# Altium PCB BLE-T1.PcbDoc (part 2 of 2)
Units mm, origin at the board's own origin, x right, y up, seen from the top; angles counter-clockwise.
Board outline 285.25 x 94.86 mm, 2 copper layers (Component Side, Bottom Layer), stack 1.571 mm thick; 182 components, 142 nets, 832 pads, 32 vias.
Unrouted connection lines stored in the file: 3.
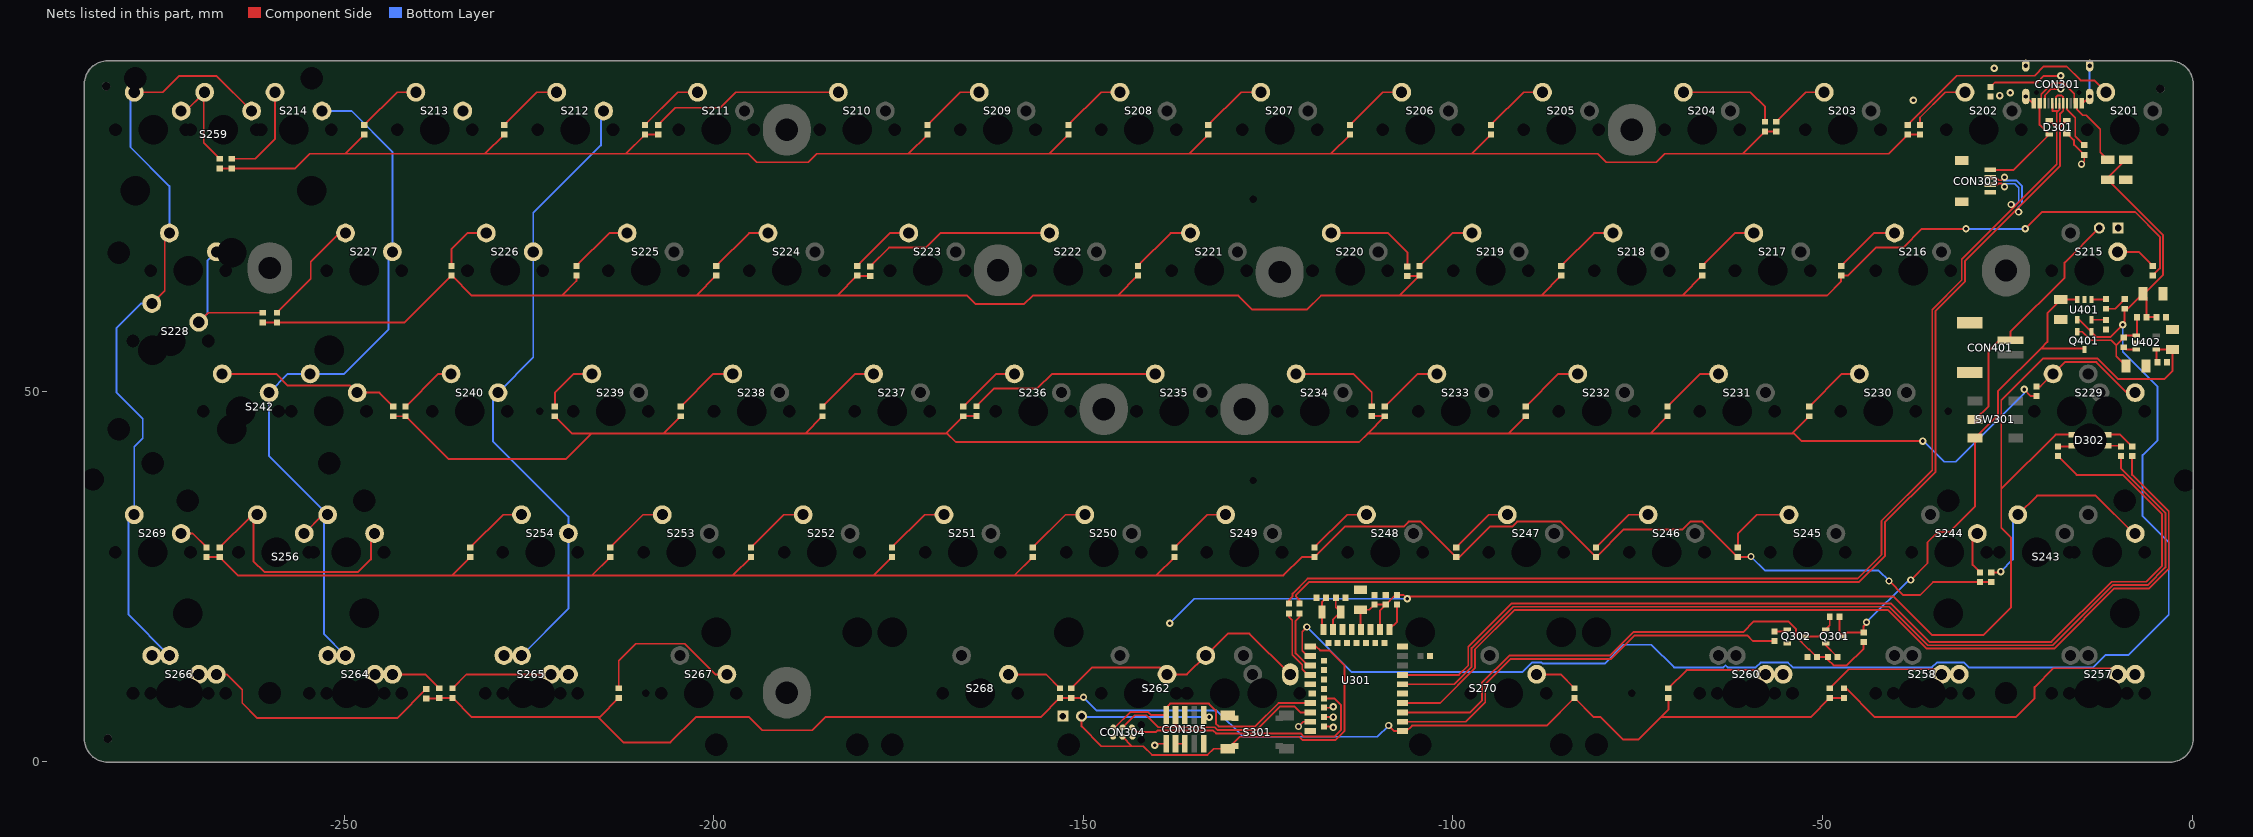
[diagram p2: the nets of this part, all layers, seen from the top]

## Via types
v1: diameter 1, hole 0.5, Component Side to Bottom Layer, tented both sides, 32 vias

## Nets (pads, with @x,y where several pads share a name; then routed paths per layer and width w, separated by ;. In a path a pad name is that pad's centre, name@x,y a point inside that pad or via, vN(x,y) a via of type N, cw(c..) or ccw(c..) an arc to the next point about the centre after c; other vN are vias at no path point) (continued)
col12: S212.2 S226.2 S240.2 S254.2 S265.2 | length 86.7
  Bottom Layer w0.254: S265.2@-226.002,14.295 -219.652,20.645 S254.2@-219.652,30.805 -219.652,33.089 -229.87,43.307 -229.87,49.163 S240.2@-229.177,49.855 -224.415,54.618 S226.2@-224.415,68.905 -224.415,74.162 -215.265,83.312 -215.265,87.58 S212.2@-214.89,87.955
col13: S213.2
col14: S214.2 S227.2 S242.2 S256.2 S264.2 | length 100.4
  Component Side w0.254: S256.2@-255.397,30.805 -252.857,33.345 S256.2@-252.222,33.345 S256.2@-252.222,33.528
  Bottom Layer w0.254: S214.2@-252.99,87.955 -248.991,87.955 -243.465,82.429 S227.2@-243.465,68.905 -243.967,68.403 -243.967,58.42 -249.992,52.395 S242.2@-254.584,52.395 -257.6,52.395 S242.2@-260.14,49.855 -260.14,41.263 S256.2@-252.222,33.345 -252.73,32.837 -252.73,17.216 S264.2@-249.809,14.295
col15: S228.2 S259.2 S266.2 S269.2 | length 106.8
  Component Side w0.254: S259.2@-278.384,90.495 -274.503,90.495 -272.288,92.71 -267.264,92.71 S259.2@-262.509,87.955 ; S228.2@-276.009,61.92 -274.266,63.663 -274.266,70.807 S228.2@-273.627,71.445
  Bottom Layer w0.254: S259.2@-279.146,89.739 S259.2@-278.39,90.495 ; S259.2@-278.384,90.495 -278.892,89.987 -278.892,83.058 -273.627,77.793 S228.2@-273.627,71.445 ; S228.2@-276.009,61.92 -277.424,61.92 -280.797,58.547 -280.797,49.911 -277.241,46.355 -277.241,43.688 -278.384,42.545 -278.384,41.021 -278.39,41.015 S269.2@-278.39,33.345 -279.146,32.589 -279.146,19.814 S266.2@-273.627,14.295
D_N: CON301.A7 CON301.B7 CON303.2 D301.2 R303.2 | length 167.6
  Component Side w0.254: R303.2@-120.777,21.309 -120.777,21.836 -121.247,22.306 -121.247,22.479 -119.491,24.235 -45.096,24.235 -41.58,27.751 -41.58,32.323 -34.722,39.181 -34.722,60.909 -30.727,64.904 -30.727,67.686 -17.869,80.545 -17.869,85.767 ; CON303.2@-27.305,78.978 -26.552,78.978 -26.162,78.588 -25.806,78.588 v1(-25.4,78.994) ; CON301.A7@-18.427,89.154 -18.427,89.86 -18.235,90.052 -17.665,90.052 -17.473,89.86 -17.473,89 CON301.B7@-17.45,89 -17.45,88.016 -17.869,87.597 -17.869,85.767 ; D301.2@-16.571,86.675 D301.2@-16.961,86.675 -17.869,85.767
  Bottom Layer w0.254: v1@-25.527,78.562 -23.814,78.562 -23.009,77.758 -23.009,75.474 -23.495,74.988 v1(-23.495,74.295)
D_P: CON301.A6 CON301.B6 CON303.3 D301.3 R304.2 | length 165.2
  Component Side w0.254: R304.2@-122.174,21.309 -122.174,21.836 -121.704,22.306 -121.704,22.668 -119.68,24.692 -45.285,24.692 -42.037,27.94 -42.037,32.512 -35.179,39.37 -35.179,61.099 -31.184,65.093 -31.184,67.876 -18.326,80.734 -18.326,85.64 ; CON303.3@-27.305,77.978 -26.403,77.978 -26.251,78.13 -25.806,78.13 v1(-25.4,77.724) ; D301.3@-19.361,86.675 -18.326,85.64 ; CON301.B6@-18.95,89 -18.927,88.977 -18.927,87.948 -18.165,87.948 ; CON301.A6@-17.95,89 -17.95,88.163 -18.165,87.948 ; -18.326,85.64 -18.326,87.786 -18.165,87.948
  Bottom Layer w0.254: v1@-25.527,78.105 -24.003,78.105 -23.466,77.568 -23.466,75.663 -23.818,75.311 v1(-24.511,75.311)
D_PRE_N: R303.1 U301.29 | length 8.3
  Component Side w0.254: R303.1@-120.777,20.009 -120.777,19.482 -121.285,18.974 -121.285,14.59 -119.649,12.954 U301.29@-119.307,12.954
D_PRE_P: R304.1 U301.31 | length 9.7
  Component Side w0.254: R304.1@-122.174,20.009 -122.174,19.482 -121.742,19.05 -121.742,14.4 -120.384,13.042 -120.384,12.419 -119.649,11.684 U301.31@-119.307,11.684
GND: C301.1 C302.1 C303.1 C304.1 C305.1 C306.1 C307.1 C402.1 C403.1 C404.1 C405.1 C406.1 CON301.A1B12 CON301.B1A12 CON301.S1 CON302.1 CON303.4 CON303.5 CON304.5 CON305.3 CON305.5 CON305.9 CON401.3 CON402.1 D301.1 Q302.2 R301.2 R302.2 R307.1 R402.2 R405.2 S301.1 U301.5 U301.21 U301.24 U401.2 U402.2 | length 13.7
  Component Side w0.254: CON305.3@-137.541,2.368 CON305.5@-136.271,2.368 ; CON301.S1@-22.52,89.915 -21.605,89 CON301.B1A12@-21.45,89 ; D301.1@-16.961,84.975 -16.002,84.016 -16.002,83.327 -15.905,83.327 R302.2@-14.605,82.027 -14.605,81.153 v1(-14.986,80.772) ; CON301.A1B12@-14.95,89 -14.795,89 CON301.S1@-13.88,89.915
  Bottom Layer w0.254: CON301.S1@-13.88,89.915 CON301.S1@-13.88,94.095
  other v1: -37.719,89.408 -26.035,90.043 -24.638,90.424 -26.797,93.726
LED1: R312.1 U301.4 | length 134.2
  Component Side w0.254: U301.4@-106.807,7.874 -101.727,7.874 -97.028,12.573 -97.028,15.113 -91.694,20.447 -41.148,20.447 -35.941,15.24 -18.669,15.24 -10.541,23.368 -5.842,23.368 -3.175,26.035 -3.175,33.782 -8.128,38.735 R312.1@-8.128,41.26
LED2: R310.2 U301.7 | length 139
  Component Side w0.254: U301.7@-106.807,11.684 -99.201,11.684 -97.936,12.949 -97.936,15.489 -92.07,21.355 -40.772,21.355 -35.565,16.148 -19.045,16.148 -10.917,24.276 -6.218,24.276 -4.083,26.411 -4.083,33.406 -9.412,38.735 -15.636,38.735 R310.2@-18.161,41.26
LED3: R311.2 U301.6 | length 133.1
  Component Side w0.254: U301.6@-106.807,10.414 -99.829,10.414 -97.482,12.761 -97.482,15.301 -91.882,20.901 -40.96,20.901 -35.753,15.694 -18.857,15.694 -10.729,23.822 -6.03,23.822 -3.629,26.223 -3.629,33.594 -9.652,39.617 R311.2@-9.652,41.26
NetC305_2: C305.2 U301.13 X301.2 | length 5
  Component Side w0.254: U301.13@-116.205,17.876 U301.13@-116.237,17.844 -116.237,19.161 X301.2@-115.205,20.193 -115.854,20.842 C305.2@-115.854,22.098
NetC306_2: C306.2 U301.11 X301.1 | length 4.6
  Component Side w0.254: U301.11@-117.507,17.844 -117.713,18.05 X301.1@-117.713,20.193 -117.713,21.576 C306.2@-117.191,22.098
NetC402_2: C402.2 D402.2 Q401.2 R404.1 U402.1 | length 15.1
  Component Side w0.254: Q401.2@-15.555,58.096 -14.892,58.096 -13.746,56.95 -10.961,56.95 -10.287,56.276 ; C402.2@-8.97,53.467 -10.287,54.784 -10.287,56.276 ; D402.2@-7.493,60.071 -7.493,57.697 U402.1@-7.598,57.592 -8.971,57.592 R404.1@-9.271,57.292 -10.287,56.276
NetCON301_A5: CON301.A5 R302.1 | length 6.6
  Component Side w0.254: CON301.A5@-16.95,89 -16.95,88.163 -15.836,87.049 -15.836,84.558 R302.1@-14.605,83.327
NetCON301_B5: CON301.B5 R301.1 | length 15.5
  Component Side w0.254: R301.1@-27.305,91.201 -26.697,91.809 -20.96,91.809 -20.059,92.71 v1(-17.78,92.71) ; CON301.B5@-19.95,89 -19.927,89.023 -19.927,90.052 -19.047,90.932 v1(-17.78,90.932)
  Bottom Layer w0.254: v1(-17.78,90.932) v1(-17.78,92.71)
NetCON401_1: CON401.1 CON402.2 SW301.2 | length 33.7
  Component Side w0.254: SW301.2@-29.376,46.228 -27.559,48.045 -27.559,55.499 -26.099,56.959 CON401.1@-24.599,56.959 -24.599,58.078 -17.272,65.405 -17.272,67.437 CON402.2@-12.573,72.136
NetD201_1: D201.1 S201.1 | length 31.5
  Component Side w0.254: D201.1@-38.481,86.065 -31.829,92.717 -21.336,92.717 -20.062,93.991 -17.012,93.991 -15.113,92.092 -13.287,92.092 S201.1@-11.69,90.495
NetD202_1: D202.1 S202.1 | length 8.5
  Component Side w0.254: D202.1@-36.83,86.065 -36.83,87.074 -33.409,90.495 S202.1@-30.74,90.495
NetD203_1: D203.1 S203.1 | length 8.1
  Component Side w0.254: D203.1@-56.261,86.502 -52.268,90.495 S203.1@-49.79,90.495
NetD204_1: D204.1 S204.1 | length 13.9
  Component Side w0.254: S204.1@-68.84,90.495 -59.761,90.495 -57.785,88.519 D204.1@-57.785,86.502
NetD205_1: D205.1 S205.1 | length 8.8
  Component Side w0.254: D205.1@-94.869,86.065 -90.439,90.495 S205.1@-87.89,90.495
NetD206_1: D206.1 S206.1 | length 8.8
  Component Side w0.254: D206.1@-113.919,86.065 -109.489,90.495 S206.1@-106.94,90.495
NetD207_1: D207.1 S207.1 | length 8.9
  Component Side w0.254: D207.1@-133.096,86.065 -128.666,90.495 S207.1@-125.99,90.495
NetD208_1: D208.1 S208.1 | length 8.8
  Component Side w0.254: D208.1@-152.019,86.065 -147.589,90.495 S208.1@-145.04,90.495
NetD209_1: D209.1 S209.1 | length 8.8
  Component Side w0.254: D209.1@-171.069,86.065 -166.639,90.495 S209.1@-164.09,90.495
NetD210_1: D210.1 S210.1 | length 26.2
  Component Side w0.254: D210.1@-207.518,86.065 -205.191,88.392 -199.136,88.392 -197.033,90.495 S210.1@-183.14,90.495
NetD211_1: D211.1 S211.1 | length 8.9
  Component Side w0.254: D211.1@-209.296,86.065 -204.866,90.495 S211.1@-202.19,90.495
NetD212_1: D212.1 S212.1 | length 8.9
  Component Side w0.254: D212.1@-228.346,86.065 -223.916,90.495 S212.1@-221.24,90.495
NetD213_1: D213.1 S213.1 | length 8.8
  Component Side w0.254: D213.1@-247.269,86.065 -242.839,90.495 S213.1@-240.29,90.495
NetD214_1: D214.1 S214.1 | length 13.3
  Component Side w0.254: D214.1@-265.176,81.493 -262.042,81.493 -259.34,84.195 S214.1@-259.34,90.495
NetD215_1: D215.1 S215.1 | length 5.6
  Component Side w0.254: S215.1@-10.102,68.905 -7.224,68.905 D215.1@-5.334,67.015
NetD216_1: D216.1 S216.1 | length 9.1
  Component Side w0.254: D216.1@-47.498,67.015 -43.068,71.445 S216.1@-40.265,71.445
NetD217_1: D217.1 S217.1 | length 8.8
  Component Side w0.254: D217.1@-66.294,67.015 -61.864,71.445 S217.1@-59.315,71.445
NetD218_1: D218.1 S218.1 | length 8.8
  Component Side w0.254: D218.1@-85.344,67.015 -80.914,71.445 S218.1@-78.365,71.445
NetD219_1: D219.1 S219.1 | length 8.9
  Component Side w0.254: D219.1@-104.521,67.015 -100.091,71.445 S219.1@-97.415,71.445
NetD220_1: D220.1 S220.1 | length 14
  Component Side w0.254: S220.1@-116.967,70.943 S220.1@-116.465,71.445 -108.783,71.445 -106.172,68.834 D220.1@-106.172,66.944
NetD221_1: D221.1 S221.1 | length 8.9
  Component Side w0.254: D221.1@-142.621,67.015 -138.191,71.445 S221.1@-135.515,71.445
NetD222_1: D222.1 S222.1 | length 26.1
  Component Side w0.254: D222.1@-178.816,66.944 -176.291,69.469 -171.323,69.469 -169.347,71.445 S222.1@-154.565,71.445
NetD223_1: D223.1 S223.1 | length 8.8
  Component Side w0.254: D223.1@-180.594,67.015 -176.164,71.445 S223.1@-173.615,71.445
NetD224_1: D224.1 S224.1 | length 8.8
  Component Side w0.254: D224.1@-199.644,67.015 -195.214,71.445 S224.1@-192.665,71.445
NetD225_1: D225.1 S225.1 | length 8.7
  Component Side w0.254: D225.1@-218.567,67.015 -214.137,71.445 S225.1@-211.715,71.445
NetD226_1: D226.1 S226.1 | length 7.9
  Component Side w0.254: D226.1@-235.458,67.015 -235.458,69.301 -233.314,71.445 S226.1@-230.765,71.445
NetD227_1: D227.1 S227.1 | length 15.1
  Component Side w0.254: D227.1@-259.08,60.665 -254.508,65.237 -254.508,67.564 -250.627,71.445 S227.1@-249.815,71.445
NetD228_1: D228.1 S228.1 | length 19.7
  Component Side w0.254: S228.1@-269.659,59.38 -268.374,60.665 D228.1@-260.985,60.665
  Bottom Layer w0.254: S228.1@-269.659,59.38 -268.478,60.561 -268.478,67.705 S228.1@-267.277,68.905
NetD229_1: D229.1 S229.1 | length 16.4
  Component Side w0.254: D229.1@-21.082,50.688 -20.541,50.688 S229.1@-18.834,52.395 -17.237,53.992 -12.978,53.992 -8.841,49.855 S229.1@-7.721,49.855
NetD230_1: D230.1 S230.1 | length 8.6
  Component Side w0.254: D230.1@-51.816,47.965 -47.386,52.395 S230.1@-45.027,52.395
NetD231_1: D231.1 S231.1 | length 8.8
  Component Side w0.254: D231.1@-70.993,47.965 -66.563,52.395 S231.1@-64.077,52.395
NetD232_1: D232.1 S232.1 | length 8.9
  Component Side w0.254: D232.1@-90.17,47.965 -85.74,52.395 S232.1@-83.127,52.395
NetD233_1: D233.1 S233.1 | length 8.9
  Component Side w0.254: D233.1@-109.22,47.965 -104.79,52.395 S233.1@-102.177,52.395
NetD234_1: D234.1 S234.1 | length 13.9
  Component Side w0.254: S234.1@-121.227,52.395 -113.482,52.395 -110.998,49.911 D234.1@-110.998,48.021
  Bottom Layer w0.254: S234.1@-121.793,51.83 S234.1@-121.227,52.395
NetD235_1: D235.1 S235.1 | length 26
  Component Side w0.254: D235.1@-164.465,48.021 -162.067,50.419 -156.21,50.419 -154.234,52.395 S235.1@-140.277,52.395
NetD236_1: D236.1 S236.1 | length 8.8
  Component Side w0.254: D236.1@-166.243,47.965 -161.813,52.395 S236.1@-159.327,52.395
NetD237_1: D237.1 S237.1 | length 8.8
  Component Side w0.254: D237.1@-185.293,47.965 -180.863,52.395 S237.1@-178.377,52.395
NetD238_1: D238.1 S238.1 | length 8.9
  Component Side w0.254: D238.1@-204.47,47.965 -200.04,52.395 S238.1@-197.427,52.395
NetD239_1: D239.1 S239.1 | length 8
  Component Side w0.254: D239.1@-221.488,47.965 -221.488,49.87 -218.963,52.395 S239.1@-216.477,52.395
NetD240_1: D240.1 S240.1 | length 8
  Component Side w0.254: D240.1@-241.681,47.965 -237.251,52.395 S240.1@-235.527,52.395
NetD242_1: D242.1 S242.1 | length 25
  Component Side w0.254: S242.1@-266.49,52.395 -259.207,52.395 -257.61,50.798 -249.177,50.798 S242.1@-248.234,49.855 -245.222,49.855 D242.1@-243.332,47.965
NetD243_1: D243.1 S243.1 | length 29
  Component Side w0.254: D243.1@-27.178,25.542 -26.02,25.542 v1(-25.908,25.654) ; S243.1@-23.596,33.345 -21,35.941 -13.081,35.941 -7.945,30.805 S243.1@-7.721,30.805
  Bottom Layer w0.254: v1(-25.908,25.654) -24.257,27.305 -24.257,32.684 S243.1@-23.596,33.345
NetD244_1: D244.1 S244.1 | length 5.9
  Component Side w0.254: S244.1@-29.083,30.805 -29.718,30.17 -29.718,26.558 D244.1@-28.702,25.542
NetD245_1: D245.1 S245.1 | length 9.8
  Component Side w0.254: D245.1@-61.468,28.915 -61.468,30.765 -58.888,33.345 S245.1@-54.552,33.345
NetD246_1: D246.1 S246.1 | length 9.9
  Component Side w0.254: D246.1@-80.645,28.915 -76.215,33.345 S246.1@-73.602,33.345 S246.1@-74.295,32.652
NetD247_1: D247.1 S247.1 | length 8.8
  Component Side w0.254: D247.1@-99.568,28.915 -95.138,33.345 S247.1@-92.652,33.345
NetD248_1: D248.1 S248.1 | length 8.9
  Component Side w0.254: D248.1@-118.745,28.915 -114.315,33.345 S248.1@-111.702,33.345
NetD249_1: D249.1 S249.1 | length 8.8
  Component Side w0.254: D249.1@-137.668,28.915 -133.238,33.345 S249.1@-130.752,33.345
NetD250_1: D250.1 S250.1 | length 8.9
  Component Side w0.254: D250.1@-156.845,28.915 -152.415,33.345 S250.1@-149.802,33.345
NetD251_1: D251.1 S251.1 | length 8.9
  Component Side w0.254: D251.1@-175.895,28.915 -171.465,33.345 S251.1@-168.852,33.345
NetD252_1: D252.1 S252.1 | length 8.9
  Component Side w0.254: D252.1@-194.945,28.915 -190.515,33.345 S252.1@-187.902,33.345
NetD253_1: D253.1 S253.1 | length 8.9
  Component Side w0.254: D253.1@-213.995,28.915 -209.565,33.345 S253.1@-206.952,33.345
NetD254_1: D254.1 S254.1 | length 8.8
  Component Side w0.254: D254.1@-232.918,28.915 -228.488,33.345 S254.1@-226.002,33.345
NetD256_1: D256.1 S256.1 | length 34.1
  Component Side w0.254: D256.1@-266.827,28.915 -262.851,32.891 S256.1@-261.747,32.891 ; S256.1@-261.747,33.345 S256.1@-261.747,32.891 ; S256.1@-245.872,30.805 -246.38,30.297 -246.38,27.305 -248.085,25.6 -260.804,25.6 -262.255,27.051 -262.255,32.383 S256.1@-261.747,32.891
NetD257_1: D257.1 S257.1 | length 42.6
  Component Side w0.254: D257.1@-47.117,9.865 -46.822,9.865 -42.926,5.969 -23.876,5.969 -21.336,8.509 -21.336,10.033 -18.796,12.573 -10.92,12.573 S257.1@-10.102,11.755
NetD258_1: D258.1 S258.1 | length 18.8
  Component Side w0.254: D258.1@-49.022,9.865 -46.441,12.446 -34.6,12.446 S258.1@-33.909,11.755 S258.1@-31.528,11.755
NetD259_1: D259.1 S259.1 | length 15
  Component Side w0.254: S259.1@-272.04,87.955 S259.1@-272.034,87.955 -271.399,87.955 S259.1@-268.986,90.368 ; S259.1@-268.859,90.495 S259.1@-268.986,90.368 ; D259.1@-266.827,81.493 -268.986,83.652 S259.1@-268.986,90.368
  Bottom Layer w0.254: S259.1@-272.04,87.955 S259.1@-271.349,88.646
NetD260_1: D260.1 S260.1 | length 14.4
  Component Side w0.254: D260.1@-70.866,9.865 -68.412,12.319 -58.291,12.319 S260.1@-57.727,11.755
NetD262_1: D262.1 S262.1 | length 35.8
  Component Side w0.254: D262.1@-151.638,9.865 -148.805,12.698 -139.632,12.698 S262.1@-138.689,11.755 -135.983,11.755 S262.1@-133.443,14.295 -130.466,17.272 -127.53,17.272 S262.1@-122.013,11.755
NetD264_1: D264.1 S264.1 | length 7.1
  Component Side w0.254: S264.1@-243.459,11.755 -238.999,11.755 D264.1@-237.109,9.865
NetD265_1: D265.1 S265.1 | length 16.5
  Component Side w0.254: D265.1@-235.331,9.865 -233.441,11.755 S265.1@-222.033,11.755 S265.1@-219.652,11.755
NetD266_1: D266.1 S266.1 | length 33.5
  Component Side w0.254: S266.1@-267.277,11.755 -265.882,11.755 -263.779,9.652 -263.779,7.874 -261.747,5.842 -242.839,5.842 D266.1@-238.887,9.794
NetD267_1: D267.1 S267.1 | length 21
  Component Side w0.254: D267.1@-212.852,9.865 -212.852,13.589 -210.549,15.892 -203.91,15.892 -199.773,11.755 S267.1@-198.221,11.755
NetD268_1: D268.1 S268.1 | length 7.7
  Component Side w0.254: S268.1@-160.121,11.755 -155.052,11.755 D268.1@-153.162,9.865
NetD269_1: D269.1 S269.1 | length 4.2
  Component Side w0.254: S269.1@-272.04,30.805 -270.495,30.805 D269.1@-268.605,28.915
NetD270_1: D270.1 S270.1 | length 5.9
  Component Side w0.254: S270.1@-88.683,11.755 -85.456,11.755 D270.1@-83.566,9.865
NetD302_1: D302.1 R310.1 | length 1.8
  Component Side w0.254: R310.1@-18.161,42.56 -16.546,42.56 D302.1@-16.434,42.672
NetD302_2: D302.2 R311.1 | length 2
  Component Side w0.254: D302.2@-11.557,42.672 -9.764,42.672 R311.1@-9.652,42.56
NetD302_3: D302.3 R312.2 | length 3.8
  Component Side w0.254: D302.3@-11.28,44.172 -9.74,44.172 R312.2@-8.128,42.56
NetD401_2: D401.2 R401.1 | length 3.1
  Component Side w0.254: R401.1@-11.684,61.199 -10.444,61.199 D401.2@-9.144,62.499
NetL301_2: L301.2 U301.25 | length 3.8
  Component Side w0.254: U301.25@-108.617,17.844 -107.569,18.892 L301.2@-107.569,21.194
NetQ301_1: Q301.1 Q302.3 R308.1 | length 5.1
  Component Side w0.254: Q302.3@-52.394,16.891 -50.537,16.891 Q301.1@-49.587,17.841 -49.037,18.391 R308.1@-49.037,19.558
NetQ301_2: Q301.2 R306.2 | length 2.5
  Component Side w0.254: Q301.2@-49.587,15.941 -49.587,15.693 R306.2@-47.991,14.097
NetQ302_1: Q302.1 R309.1 | length 1.8
  Component Side w0.254: R309.1@-56.515,17.541 -55.094,17.541 Q302.1@-54.794,17.841
NetR401_2: R401.2 U401.1 | length 2
  Component Side w0.254: U401.1@-13.655,62.462 -11.721,62.462 R401.2@-11.684,62.499
NetR402_1: R402.1 U401.5 | length 2
  Component Side w0.254: U401.5@-13.655,59.712 -11.691,59.712 R402.1@-11.684,59.705
NetR404_2: R404.2 U402.3 | length 1.8
  Component Side w0.254: R404.2@-9.271,55.992 -8.971,55.692 U402.3@-7.598,55.692
NetU301_10: U301.10
NetU301_12: U301.12
NetU301_14: U301.14
NetU301_15: U301.15
NetU301_16: U301.16
NetU301_17: U301.17
NetU301_18: U301.18
NetU301_20: U301.20
NetU301_22: U301.22
NetU301_28: U301.28
NetU301_30: U301.30
NetU301_32: U301.32
NetU301_33: U301.33
NetU301_34: U301.34
NetU301_35: U301.35
NetU301_38: U301.38 | length 1.3
  Component Side w0.254: U301.38@-117.457,7.239 -116.332,7.239 v1(-116.205,7.366)
NetU301_40: U301.40 | length 1.3
  Component Side w0.254: U301.40@-117.457,5.969 v1(-116.205,5.969)
NetU301_41: U301.41 | length 1.9
  Component Side w0.254: v1(-120.904,4.699) -120.269,5.334 U301.41@-119.307,5.334
NetU301_42: U301.42 | length 1
  Component Side w0.254: U301.42@-117.457,4.699 v1@-116.459,4.699
  other v1: -116.205,4.572
NetU301_43: U301.43
P0.18/RESET: CON302.2 CON304.3 CON305.10 S301.2 U301.26 | length 74.8
  Component Side w0.254: CON302.2@-150.241,6.096 -150.241,4.699 -147.574,2.032 -143.43,2.032 ; CON304.3@-144.7,3.302 -143.43,2.032 ; CON305.10@-133.731,6.268 -133.268,6.268 v1(-132.969,5.969) ; U301.26@-119.307,15.494 -118.491,15.494 -117.983,14.986 -116.713,14.986 -114.681,12.954 -114.681,4.064 -115.862,2.883 -120.38,2.883 -120.799,3.302 -128.852,3.302 S301.2@-130.467,1.687 -132.37,1.687 -133.216,0.841 -140.692,0.841 -141.883,2.032 -143.43,2.032
  Bottom Layer w0.254: CON302.2@-150.241,6.096 -150.114,5.969 v1(-132.969,5.969)
RAW: CON301.A4B9 CON301.B4A9 CON303.1 D301.4 F301.2 | length 33.1
  Component Side w0.254: CON303.1@-27.305,79.978 -24.158,79.978 D301.4@-19.361,84.775 -20.65,86.064 CON301.B4A9@-20.65,89 -20.427,89 -20.427,90.194 -18.862,91.759 -17.588,91.759 -17.526,91.821 -17.464,91.759 -17.437,91.759 -15.962,90.284 -15.962,89 CON301.A4B9@-15.75,89 -15.577,88.827 -15.577,88.14 -14.813,87.376 -14.351,87.376 -12.446,85.471 -12.446,82.376 F301.2@-11.43,81.36
row1: D201.2 D202.2 D203.2 D204.2 D205.2 D206.2 D207.2 D208.2 D209.2 D210.2 D211.2 D212.2 D213.2 D214.2 D259.2 | length 270.7
  Component Side w0.254: D259.2@-266.827,80.193 D214.2@-265.176,80.193 -256.611,80.193 -254.635,82.169 -249.865,82.169 ; D213.2@-247.269,84.765 -249.865,82.169 ; D212.2@-228.346,84.765 -230.942,82.169 ; D210.2@-207.518,84.765 D211.2@-209.296,84.765 -211.892,82.169 ; D209.2@-171.069,84.765 -173.665,82.169 ; D208.2@-152.019,84.765 -154.615,82.169 ; D207.2@-133.096,84.765 -135.692,82.169 ; D206.2@-113.919,84.765 -116.515,82.169 ; D205.2@-94.869,84.765 -97.465,82.169 ; D203.2@-56.261,85.202 D204.2@-57.785,85.202 -60.818,82.169 ; D202.2@-36.83,84.765 D201.2@-38.481,84.765 -41.077,82.169 -60.818,82.169 ; -249.865,82.169 -230.942,82.169 ; -230.942,82.169 -211.892,82.169 ; -211.892,82.169 -195.326,82.169 -194.183,81.026 -187.198,81.026 -186.055,82.169 -173.665,82.169 ; -173.665,82.169 -154.615,82.169 ; -154.615,82.169 -135.692,82.169 ; -135.692,82.169 -116.515,82.169 ; -116.515,82.169 -97.465,82.169 ; -97.465,82.169 -80.391,82.169 -79.248,81.026 -72.517,81.026 -71.374,82.169 -60.818,82.169
row2: D215.2 D216.2 D217.2 D218.2 D219.2 D220.2 D221.2 D222.2 D223.2 D224.2 D225.2 D226.2 D227.2 D228.2 | length 305.1
  Component Side w0.254: D228.2@-260.985,59.365 D227.2@-259.08,59.365 -241.808,59.365 D226.2@-235.458,65.715 -232.735,62.992 -220.535,62.992 ; D225.2@-218.567,65.715 -218.567,64.96 -220.535,62.992 ; D224.2@-199.644,65.715 -202.367,62.992 ; D222.2@-178.816,65.644 -180.523,65.644 D223.2@-180.594,65.715 -183.317,62.992 ; D221.2@-142.621,65.715 -145.344,62.992 ; D220.2@-106.172,65.644 D219.2@-104.592,65.644 ; D219.2@-104.521,65.715 D219.2@-104.592,65.644 ; D218.2@-85.344,65.715 -88.067,62.992 ; D217.2@-66.294,65.715 -69.017,62.992 ; v1(-30.607,72.009) -36.576,72.009 -39.116,69.469 -42.799,69.469 -46.553,65.715 D216.2@-47.498,65.715 -47.498,64.904 -49.41,62.992 -69.017,62.992 ; v1(-22.606,72.009) -20.32,74.295 -7.747,74.295 -4.391,70.939 -4.391,66.658 D215.2@-5.334,65.715 ; -220.535,62.992 -202.367,62.992 ; -202.367,62.992 -183.317,62.992 ; -183.317,62.992 -165.735,62.992 -164.592,61.849 -157.988,61.849 -156.845,62.992 -145.344,62.992 ; -145.344,62.992 -129.032,62.992 -127.127,61.087 -119.761,61.087 -117.856,62.992 -107.244,62.992 ; -107.244,62.992 D219.2@-104.592,65.644 ; -107.244,62.992 -88.067,62.992 ; -88.067,62.992 -69.017,62.992
  Bottom Layer w0.254: v1(-30.607,72.009) v1(-22.606,72.009)
row3: D229.2 D230.2 D231.2 D232.2 D233.2 D234.2 D235.2 D236.2 D237.2 D238.2 D239.2 D240.2 D242.2 | length 266.3
  Component Side w0.254: D242.2@-243.332,46.665 D240.2@-241.681,46.665 -235.91,40.894 -219.964,40.894 -216.535,44.323 ; D239.2@-221.488,46.665 -219.146,44.323 -216.535,44.323 ; D238.2@-204.47,46.665 -206.812,44.323 ; D237.2@-185.293,46.665 -187.635,44.323 ; D235.2@-164.465,46.721 -166.187,46.721 D236.2@-166.243,46.665 -168.585,44.323 ; D234.2@-110.998,46.721 -109.276,46.721 D233.2@-109.22,46.665 -111.562,44.323 ; D232.2@-90.17,46.665 -92.512,44.323 ; D231.2@-70.993,46.665 -73.335,44.323 ; D230.2@-51.816,46.665 -54.158,44.323 ; v1(-36.449,43.307) -52.832,43.307 -53.848,44.323 -54.158,44.323 ; v1(-22.733,50.292) -21.829,49.388 D229.2@-21.082,49.388 ; -216.535,44.323 -206.812,44.323 ; -206.812,44.323 -187.635,44.323 ; -187.635,44.323 -168.585,44.323 ; -168.585,44.323 -168.402,44.323 -167.259,43.18 -112.705,43.18 -111.562,44.323 ; -111.562,44.323 -92.512,44.323 ; -92.512,44.323 -73.335,44.323 ; -73.335,44.323 -54.158,44.323
  Bottom Layer w0.254: v1@-36.576,43.561 -33.528,40.513 -32.004,40.513 -22.733,49.784 v1(-22.733,50.292)
row4: D243.2 D244.2 D245.2 D246.2 D247.2 D248.2 D249.2 D250.2 D251.2 D252.2 D253.2 D254.2 D256.2 D269.2 | length 279.2
  Component Side w0.254: D269.2@-268.605,27.615 D256.2@-266.827,27.615 -264.358,25.146 -235.387,25.146 ; D254.2@-232.918,27.615 -235.387,25.146 ; D253.2@-213.995,27.615 -216.464,25.146 ; D252.2@-194.945,27.615 -197.414,25.146 ; D251.2@-175.895,27.615 -178.364,25.146 ; D250.2@-156.845,27.615 -159.314,25.146 ; D249.2@-137.668,27.615 -140.137,25.146 ; v1(-59.69,27.686) -59.761,27.615 D245.2@-61.468,27.615 -66.255,32.402 -67.914,32.402 -68.947,31.369 -76.891,31.369 D246.2@-80.645,27.615 -85.432,32.402 -91.337,32.402 -91.991,31.748 -94.998,31.748 -99.131,27.615 D247.2@-99.568,27.615 -104.355,32.402 -106.014,32.402 -106.668,31.748 -114.612,31.748 D248.2@-118.745,27.615 -120.467,27.615 -122.936,25.146 -140.137,25.146 ; v1(-41.021,24.384) -39.116,22.479 -36.83,22.479 -35.067,24.242 D244.2@-28.702,24.242 D243.2@-27.178,24.242 ; -235.387,25.146 -216.464,25.146 ; -216.464,25.146 -197.414,25.146 ; -197.414,25.146 -178.364,25.146 ; -178.364,25.146 -159.314,25.146 ; -159.314,25.146 -140.137,25.146
  Bottom Layer w0.254: v1(-59.69,27.686) -57.785,25.781 -42.418,25.781 v1(-41.021,24.384)
row5: D257.2 D258.2 D260.2 D262.2 D264.2 D265.2 D266.2 D267.2 D268.2 D270.2 U301.1 | length 214.9
  Component Side w0.254: D266.2@-238.887,8.494 -237.18,8.494 D264.2@-237.109,8.565 D265.2@-235.331,8.565 -232.735,5.969 -215.646,5.969 ; D267.2@-212.852,8.565 -215.448,5.969 -215.646,5.969 ; v1(-149.987,8.636) -150.058,8.565 D262.2@-151.638,8.565 D268.2@-153.162,8.565 -155.758,5.969 -184.912,5.969 -186.69,4.191 -193.421,4.191 -195.199,5.969 -202.438,5.969 -205.867,2.54 -212.217,2.54 -215.646,5.969 ; v1(-108.712,4.826) -107.95,4.064 U301.1@-106.807,4.064 -106.299,4.064 -105.537,4.826 -87.305,4.826 D270.2@-83.566,8.565 -80.97,5.969 -80.01,5.969 -76.962,2.921 -74.93,2.921 -71.882,5.969 ; D260.2@-70.866,8.565 -70.866,6.985 -71.882,5.969 ; D257.2@-47.117,8.565 D258.2@-49.022,8.565 -51.618,5.969 -71.882,5.969
  Bottom Layer w0.254: v1(-149.987,8.636) -148.209,6.858 -131.953,6.858 -128.397,3.302 -110.236,3.302 v1(-108.712,4.826)
SWDCLK: CON304.4 CON305.4 U301.39 | length 30.4
  Component Side w0.254: CON304.4@-144.7,4.572 -143.049,6.223 -141.478,6.223 -139.854,4.599 -137.187,4.599 ; CON305.4@-137.541,6.268 -137.541,4.953 -137.187,4.599 ; U301.39@-119.307,6.604 -120.65,6.604 -121.466,7.42 -123.396,7.42 -126.571,4.245 -131.887,4.245 -132.241,4.599 -137.187,4.599
SWDIO: CON304.2 CON305.2 U301.37 | length 32.5
  Component Side w0.254: CON304.2@-145.97,4.572 -145.721,4.572 -143.616,6.677 -141.29,6.677 -140.881,6.268 CON305.2@-138.811,6.268 -138.811,7.239 -138.255,7.795 -133.017,7.795 -132.08,6.858 -132.08,5.08 -131.699,4.699 -126.759,4.699 -123.584,7.874 U301.37@-119.307,7.874
SWO: CON304.6 CON305.6 U301.36 | length 35.4
  Component Side w0.254: CON304.6@-143.43,4.572 -142.795,3.937 -140.208,3.937 -140,4.145 -132.429,4.145 -132.04,3.756 -120.611,3.756 -120.192,3.337 -116.05,3.337 -115.135,4.252 -115.135,7.566 -116.078,8.509 U301.36@-117.457,8.509
VBAT: C406.2 Q301.3 Q401.3 R305.2 R308.2 SW301.1 U401.3 | length 70.8
  Component Side w0.254: R308.2@-47.737,19.558 -47.737,17.441 Q301.3@-47.187,16.891 -46.664,17.414 R305.2@-44.45,17.414 -44.45,18.288 v1@-44.196,18.542 ; v1(-38.1,24.511) -35.814,26.797 -35.814,29.591 -34.417,30.988 -32.893,30.988 -29.376,34.505 SW301.1@-29.376,43.728 -26.289,46.815 -26.289,50.038 -20.501,55.826 ; U401.3@-15.555,62.462 -17.755,62.462 C406.2@-17.78,62.437 -19.598,60.619 -19.598,56.729 -20.501,55.826 ; Q401.3@-14.605,55.696 -14.735,55.826 -20.501,55.826
  Bottom Layer w0.254: v1(-44.069,18.796) -38.354,24.511 v1(-38.1,24.511)
VBAT_EN: R309.2 U301.2 | length 56.9
  Component Side w0.254: U301.2@-106.807,5.334 -98.298,5.334 -95.631,8.001 -95.631,10.414 -92.202,13.843 -78.613,13.843 -75.438,17.018 -60.198,17.018 -59.421,16.241 R309.2@-56.515,16.241
VBAT_SENSE: R305.1 R306.1 R307.2 U301.3 | length 74
  Component Side w0.254: U301.3@-106.807,6.604 -97.67,6.604 -96.085,8.189 -96.085,10.602 -92.39,14.297 -78.801,14.297 -75.626,17.472 -60.76,17.472 -59.309,18.923 -54.639,18.923 -53.594,17.878 -53.594,16.854 -51.853,15.113 -51.786,15.113 R307.2@-50.77,14.097 R306.1@-49.291,14.097 -49.291,13.731 -48.514,12.954 -46.736,12.954 -44.45,15.24 R305.1@-44.45,16.114
VBUS: C304.2 C405.2 D401.1 D402.1 F301.1 Q401.1 R405.1 U301.27 U401.4 | length 216.2
  Component Side w0.254: v1(-119.761,18.161) -120.396,17.526 -120.396,14.986 -120.384,14.974 -120.384,14.959 -119.649,14.224 U301.27@-119.307,14.224 ; U401.4@-15.555,59.712 -15.271,59.712 Q401.1@-13.655,58.096 -12.963,57.404 -11.049,57.404 v1(-9.398,59.055) -9.144,59.309 D401.1@-9.144,61.199 -8.731,61.199 C405.2@-6.684,63.246 ; C304.2@-9.017,81.36 -11.43,78.947 F301.1@-11.43,78.66 -3.937,71.167 -3.937,65.825 -6.516,63.246 C405.2@-6.684,63.246 ; R405.1@-4.841,60.071 D402.1@-6.193,60.071 -6.193,62.755 C405.2@-6.684,63.246
  Bottom Layer w0.254: v1(-119.761,18.161) -113.665,12.065 -90.631,12.065 -89.344,13.352 -88.022,13.352 -87.878,13.208 -79.502,13.208 -76.962,15.748 -73.152,15.748 -70.102,12.698 -63.416,12.698 -63.139,12.974 -62.863,12.698 -59.042,12.698 -58.388,13.352 -54.684,13.352 -54.03,12.698 -35.224,12.698 -34.57,13.352 -30.866,13.352 -30.212,12.698 -13.41,12.698 -11.757,14.351 -8.636,14.351 -3.175,19.812 -3.175,29.591 -6.731,33.147 -6.731,41.402 -4.699,43.434 -4.699,50.673 -9.398,55.372 v1(-9.398,59.055)
VCC3V3: C301.2 C302.2 C303.2 C403.2 C404.2 CON304.1 CON305.1 D302.4 L301.1 U301.19 U301.23 U402.4 | length 209.6
  Component Side w0.254: v1(-140.335,2.159) -140.126,2.368 CON305.1@-138.811,2.368 ; U301.19@-112.427,17.844 -112.522,17.939 C301.2@-112.522,20.494 -111.317,20.494 C302.2@-110.617,21.194 -110.602,21.179 C303.2@-109.093,21.179 ; U301.23@-109.887,17.844 -109.887,20.385 C303.2@-109.093,21.179 ; D302.4@-16.157,44.172 -18.493,44.172 -25.835,36.83 ; C403.2@-4.729,53.975 -4.848,54.094 U402.4@-4.848,55.692 -4.829,55.673 C404.2@-2.667,55.673 -2.667,52.832 -3.81,51.689 -10.033,51.689 -12.827,54.483 -20.183,54.483 -25.835,48.831 -25.835,36.83 ; C303.2@-109.093,21.179 -107.778,22.494 L301.1@-107.569,22.494 -106.695,22.494 v1(-106.172,21.971) -105.88,22.263 -40.396,22.263 -35.189,17.056 -28.283,17.056 -24.511,20.828 -24.511,30.226 -25.835,31.55 -25.835,36.83
  Bottom Layer w0.254: v1(-138.303,18.669) -135.001,21.971 v1(-106.172,21.971)
pads on no net: CON301. CON301.A8 CON301.B8 CON304.0 CON305.7 CON305.8 CON401.2 D302. S201. S202. S203. S204. S205. S206. S207. S208. S209. S210. S211. S212. S213. S214. S215. S216. S217. S218. S219. S220. S221. S222. S223. S224. S225. S226. S227. S228. S229. S230. S231. S232. S233. S234. S235. S236. S237. S238. S239. S240. S242. S243. S244. S245. S246. S247. S248. S249. S250. S251. S252. S253. S254. S256. S257. S258. S259. S260. S262. S264. S265. S266. S267. S268. S269. S270. S301. SW301.3 SW301.4 SW301.5 SW301.6 U402.5

## Other copper
Component Side:
  pour cut-out: 2.44,4.117 ccw(c0.94,4.117) -0.561,4.117 cw(c-4.06,4.117) -4.06,0.617 ccw(c-4.06,-0.883) -5.561,-0.883 ccw(c-4.06,-0.883) -4.06,-2.384 ccw(c-4.06,4.117)
Bottom Layer:
  pour cut-out: 2.44,4.117 ccw(c0.94,4.117) -0.561,4.117 cw(c-4.06,4.117) -4.06,0.617 ccw(c-4.06,-0.883) -5.561,-0.883 ccw(c-4.06,-0.883) -4.06,-2.384 ccw(c-4.06,4.117)

## Silkscreen, mask and mechanical layers (free items; w line width, h text height)
Top Overlay:
  lines w0.254: -148.209,16.383 -123.698,16.383 -123.698,24.384 -148.209,24.384 -148.209,16.383
  text "BLE-T1-MX" at -146.558,20.193 h5
  text "Rev A1" at -146.431,18.034 h2
  text "by 4pplet" at -133.985,18.034 h2
outline:
  lines w0.203: -195.49,94.615 -195.484,94.608 ; -119.294,94.604 -119.29,94.608
  lines w0.254: -282,0.01 cw(c-282,3.01) -285,3.01 -285,91.615 cw(c-282,91.615) -282,94.615 -195.49,94.615 ; -282,0.015 -3,0.015 ; -198.628,94.615 -119.294,94.615 ; -119.253,94.615 -24.13,94.615 -12.192,94.615 -3.048,94.615 ; -3,0.01 ccw(c-3,3.01) 0,3.01 0,91.615 ccw(c-3,91.615) -3,94.615

## Text inside footprints (layer, text, board x,y; h text height)
CON301: Mechanical 15 "connector edge" at -15.25,96.25 h1 r180
CON305: Top Overlay "1" at -140.081,3.048 h1.02 r180
CON401: Top Overlay "+" at -22.821,59.658 h1.54 r270; Top Overlay "3.7V Li-ION" at -46.482,55.245 h1.3; Top Overlay "-" at -22.567,52.038 h1.54
S262: Mechanical 16 "7U" at -208.331,7.365 h1.52 r270; Mechanical 16 "6.25U" at -188.764,5.615 h1.52 r270